# Altium PCB CD Spot Welder Control Circuit PCB_2023-06-06.pcbdoc
Units mil, origin at the board's own origin, x right, y up, seen from the top; angles counter-clockwise.
Board outline 10544 x 5595 mil, 2 copper layers (Top Layer, Bottom Layer); 45 components, 56 nets, 186 pads, 121 vias.
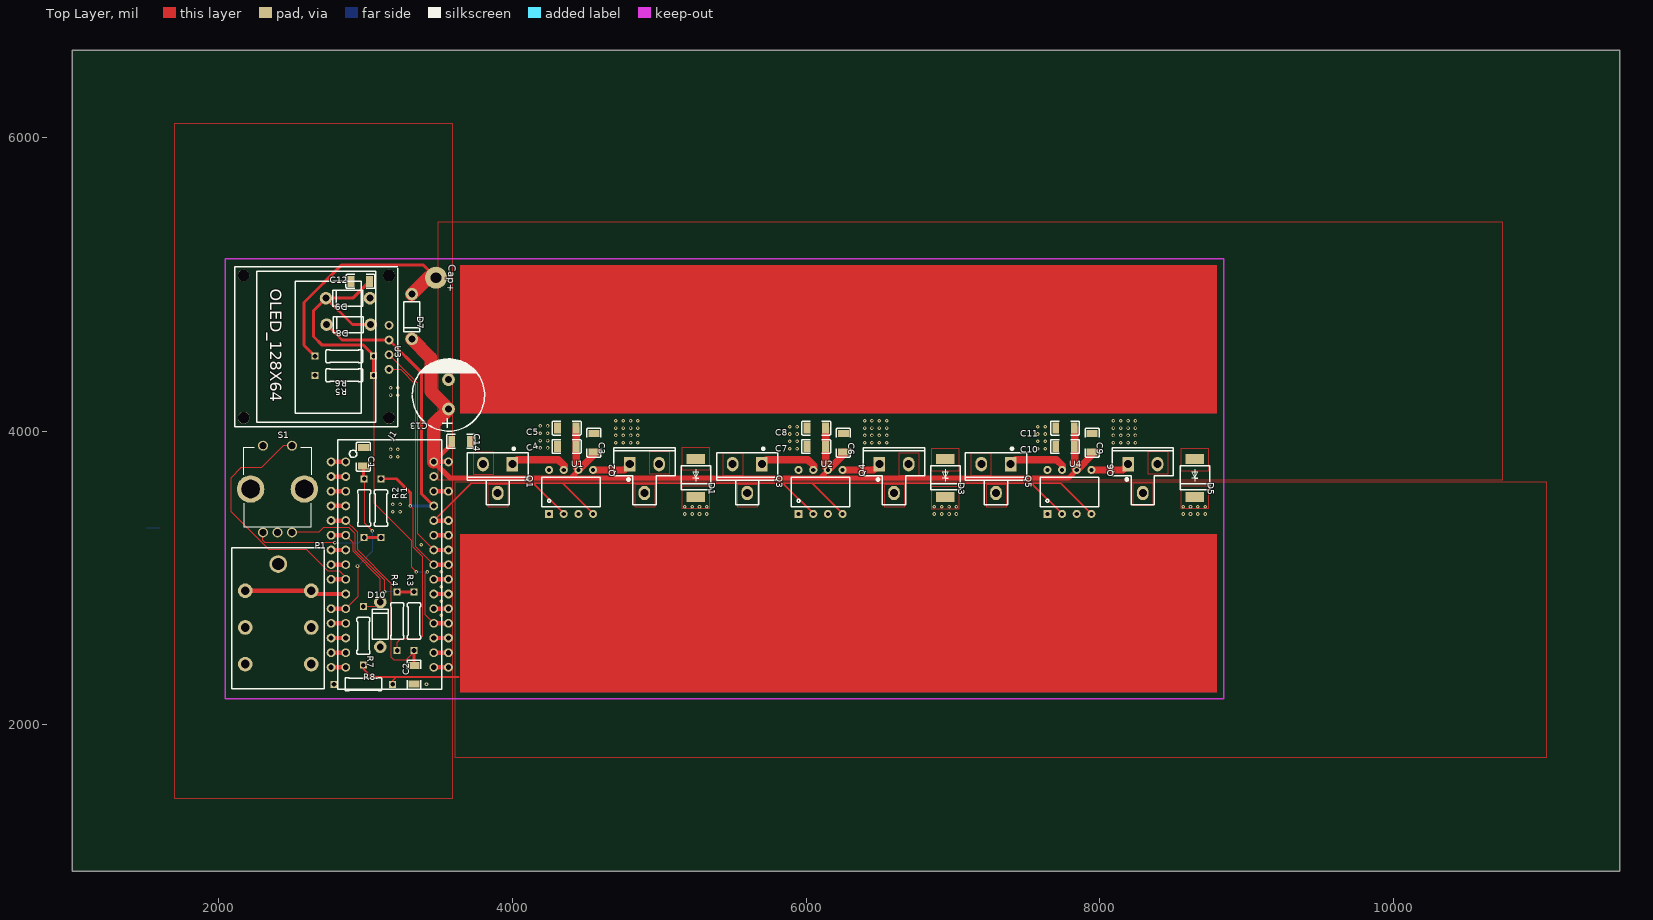
[diagram p0: Top Layer view]
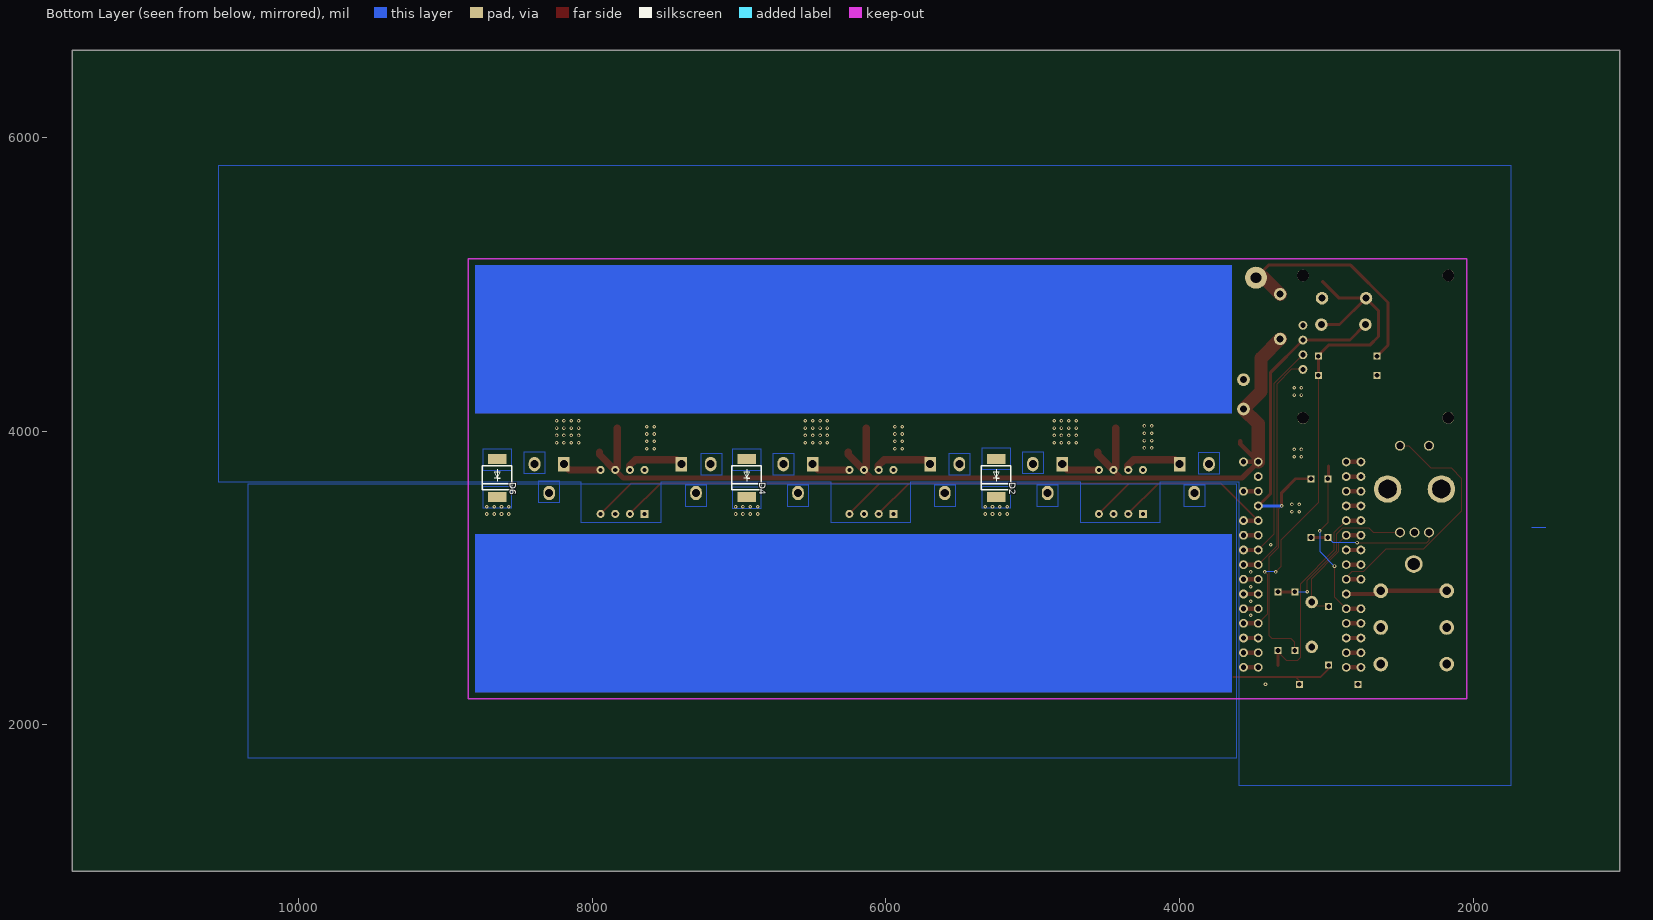
[diagram p1: Bottom Layer view, seen from below]

## Layer stack, top to bottom
Top Layer: signal copper (thickness not stored)
Dielectric: dielectric 12.6, FR-4, Dk 4.8
Bottom Layer: signal copper (thickness not stored)

## Board outline
11544,1000 1000,1000 1000,6595 11544,6595

## Components (designator, comment, footprint, x,y, rotation, side; value= is the part's Value field where it differs from the comment)
C1 "10nF" C1206 2984,3825 r270 top
C2 "10nF" C1206 3329,2340 r90 top
C3 "100nF" C1206 4554,3920 r270 top
C4 "2.2uF" C1206 4369,3895 r0 top
C5 "2.2uF" C1206 4369,4020 r0 top
C6 "100nF" C1206 6254,3920 r270 top
C7 "2.2uF" C1206 6069,3895 r0 top
C8 "2.2uF" C1206 6069,4020 r0 top
C9 "100nF" C1206 7949,3920 r270 top
C10 "2.2uF" C1206 7764,3895 r0 top
C11 "2.2uF" C1206 7764,4020 r0 top
C12 "10nF" C1206 2964,5020 r0 top
C13 "470uF" CAP-D12.5XF5.0 3564,4250 r180 top
C14 "2.2uF" C1206 3649,3930 r0 top
D1 "TVS Diode" SMC(DO-214AB)#1 5248.97,3680 r270 top
D2 "TVS Diode" SMC(DO-214AB)#2 5248.97,3680 r90 bottom
D3 "TVS Diode" SMC(DO-214AB)#1 6948.97,3680 r270 top
D4 "TVS Diode" SMC(DO-214AB)#2 6948.97,3680 r90 bottom
D5 "TVS Diode" SMC(DO-214AB)#1 8648.97,3680 r270 top
D6 "TVS Diode" SMC(DO-214AB)#2 8648.97,3680 r90 bottom
D7 "1N4007" DO-41#1 3314,4780 r270 top
D8 "1N5819" DO-41#2 3034,4725 r180 top
D9 "1N5819" DO-41#2 3029,4905 r180 top
D10 "1N4732A" DO-41#3 3099,2530 r90 top
J1 "Arduino_Nano_Header" DIP-30_L43.18-W15.24-ARDUINONANO 3164,3090 r0 top
P1 "Amphenol ACJS-MHDR" "AMPHENOL ACJS-MHDR" 2404,2245 r180 top
Q1 "IRFB7430PBF_R_OFFSET_FOOTPRINT" TO-220-3_MIDDLE_OFFSET_R 3899,3775 r270 top
Q2 "IRFB7430PBF_L_OFFSET_FOOTPRINT" TO-220-3_MIDDLE_OFFSET_L 4899,3775 r90 top
Q3 "IRFB7430PBF_R_OFFSET_FOOTPRINT" TO-220-3_MIDDLE_OFFSET_R 5599,3775 r270 top
Q4 "IRFB7430PBF_L_OFFSET_FOOTPRINT" TO-220-3_MIDDLE_OFFSET_L 6599,3775 r90 top
Q5 "IRFB7430PBF_R_OFFSET_FOOTPRINT" TO-220-3_MIDDLE_OFFSET_R 7294,3775 r270 top
Q6 "IRFB7430PBF_L_OFFSET_FOOTPRINT" TO-220-3_MIDDLE_OFFSET_L 8294,3775 r90 top
R1 "10k" RTH025W 3104,3475 r90 top
R2 "10k" RTH025W 2989,3475 r90 top
R3 "10k" RTH025W 3329,2705 r270 top
R4 "10k" RTH025W 3214,2705 r90 top
R5 "3.3k" RTH025W 2854,4380 r0 top
R6 "10k" RTH025W 2854,4510 r180 top
R7 "620" RTH025W 2984,2605 r270 top
R8 "1k" RTH025W 2984,2275 r0 top
S1 "EN11-HSM" EN11HSM1BF20 2399,3605 r0 top
U1 "MCP1404-EP_FULL_SCHEMATIC" DIP8 4399,3585 r0 top
U2 "MCP1404-EP_FULL_SCHEMATIC" DIP8 6099,3585 r0 top
U3 "OLED_128X64" OLED_128X64 2719,4620 r270 top
U4 "MCP1404-EP_FULL_SCHEMATIC" DIP8 7794,3585 r0 top

## Footprints (in the part's own frame and the unit in brackets; to place one, negate y for a bottom-side part, rotate by r counter-clockwise, add the part's x,y. Pads: shape width x height; smd on the part's side, far side on the other; paste and mask are expansions set on the pad)
"AMPHENOL ACJS-MHDR" [mil]
  round 120 hole 83: 7(0,-849)
  round 100 hole 60: R(-224.5,-417) RN(224.5,-417) S(-224.5,-167) SN(224.5,-167) T(-224.5,-667) TN(224.5,-667)
  silkscreen extent -315,-960 315,0
C1206 [mm]
  rect 1.2x1.9 smd: 1(-1.6,0) 2(1.6,0)
  silkscreen extent -2.5,-1.2 2.5,1.2
CAP-D12.5XF5.0 [mm]
  round 2.2 hole 1.2: 1(0,2.54) 2(0,-2.54)
  silkscreen extent -6.25,-6.17 6.25,6.37
DIP8 [mil]
  rect 55x55 hole 28: 1(-150,-150)
  round 55 hole 28: 2(-50,-150) 3(50,-150) 4(150,-150) 5(150,150) 6(50,150) 7(-50,150) 8(-150,150)
  silkscreen extent -200,-100 200,100
DIP-30_L43.18-W15.24-ARDUINONANO [mil]
  round 60 hole 36: 1(-300,700) 2(-300,600) 3(-300,500) 4(-300,400) 5(-300,300) 6(-300,200) 7(-300,100) 8(-300,0) 9(-300,-100) 10(-300,-200) 11(-300,-300) 12(-300,-400) 13(-300,-500) 14(-300,-600) 15(-300,-700) 16(300,-700) 17(300,-600) 18(300,-500) 19(300,-400) 20(300,-300) 21(300,-200) 22(300,-100) 23(300,0) 24(300,100) 25(300,200) 26(300,300) 27(300,400) 28(300,500) 29(300,600) 30(300,700)
  silkscreen extent -354,-850 354,850
DO-41#1 [mil]
  round 85 hole 47.24: 1(-152.5,0) 2(152.5,0)
  silkscreen extent -103,-54 103,54
DO-41#2 [mil]
  round 85 hole 47.24: 1(0,0) 2(300,0)
  silkscreen extent 50,-54 255,54
DO-41#3 [mil]
  round 85 hole 47.24: 1(0,0) 2(305,0)
  silkscreen extent 50,-54 255,54
EN11HSM1BF20 [mm]
  round 1.725 hole 1.15 slot 1.155 at 0 deg: 1(-2.5,-7.5) 2(0,-7.5) 3(2.5,-7.5) 4(-2.5,7.5) 5(2.5,7.5)
  round 4.743 hole 3.162 slot 3.167 at 0 deg: 6(-4.65,0) 7(4.65,0)
  silkscreen extent -5.85,-6.5 5.85,7.25
OLED_128X64 [mil]
  round 60 hole 36: 1(-100,440) 2(0,440) 3(100,440) 4(200,440)
  round 80 hole 80 unplated: ""(-440,440) ""(-440,-550) ""(530,440) ""(530,-550)
  silkscreen extent -500,-610 590,500
RTH025W [mil]
  rect 47.7x47.7 hole 32: 1(-200,0) 2(200,0)
  silkscreen extent -125,-45 125,45
SMC(DO-214AB)#1 [mil]
  rect 67.87x126 smd: 1(-128.41,0) 2(128.41,0)
  silkscreen extent -82,-100 81,100
SMC(DO-214AB)#2 [mil]
  rect 67.87x126 smd: 1(128.41,0) 2(-128.41,0)
  silkscreen extent -81,-100 82,100
TO-220-3_MIDDLE_OFFSET_L [mm]
  rect 2.5x2 hole 1.4: 1(0,2.54)
  oval 2.5x2 hole 1.4: 2(-5,0) 3(0,-2.54)
  silkscreen extent -7,-5.3 2.8,5.3
TO-220-3_MIDDLE_OFFSET_R [mm]
  rect 2.5x2 hole 1.4: 1(0,2.54)
  oval 2.5x2 hole 1.4: 2(5,0) 3(0,-2.54)
  silkscreen extent -2.86,-5.3 7,5.3

## Free pads (board coordinates)
  round 150 hole 72: 1(3479,5045)
  round 60 hole 36: 2(2764,2390) 2(2764,2490) 2(2764,2590) 2(2764,2690) 2(2764,2790) 2(2764,2990) 2(2764,3090) 2(2764,3190) 2(2764,3290) 2(2764,3390) 2(2764,3490) 2(2764,3590) 2(2764,3690) 2(2764,3790) 2(3564,2390) 2(3564,2490) 2(3564,2590) 2(3564,2690) 2(3564,2790) 2(3564,2890) 2(3564,2990) 2(3564,3090) 2(3564,3190) 2(3564,3290) 2(3564,3390) 2(3564,3590) 2(3564,3790)

## Via types
v1: diameter 24, hole 12, Top Layer to Bottom Layer, tented both sides, 121 vias

## Nets (pads, with @x,y where several pads share a name; then routed paths per layer and width w, separated by ;. In a path a pad name is that pad's centre, name@x,y a point inside that pad or via, vN(x,y) a via of type N, cw(c..) or ccw(c..) an arc to the next point about the centre after c; other vN are vias at no path point)
+5V: D8.2 J1.27 R1.2 R4.1 U3.2 | length 3383
  Top Layer w8: R4.1 3214,2560 3239,2585 3369,2585 3389,2605 3389,3145 3324,3210 3324,3470 v1(3304,3490)
  Top Layer w20: D8.2 2839,4620 U3.2 3379,4400 3379,3575 J1.27 ; R1.2 3209,3675 3304,3580 v1(3304,3490)
  Bottom Layer w20: v1(3304,3490) J1.27
GND: C1.1 C2.1 C3.1 C4.1 C5.1 C6.1 C7.1 C8.1 C9.1 C10.1 C11.1 C12.1 C13.2 C14.2 D1.1 D2.1 D3.1 D4.1 D5.1 D6.1 D9.1 D10.1 J1.4 J1.29 P1.S P1.SN pad.2@2764,3490 Q1.3 Q2.3 Q3.3 Q4.3 Q5.3 Q6.3 R5.1 R8.1 S1.2 S1.4 U1.3 U2.3 U3.1 U4.3 | length 100
  Top Layer w30: pad.2@2764,3490 J1.4
  other v1: 3414,2275 3514,2745 3514,2840 3514,2940 3514,3040 3379,3225 3184,3450 3234,3450 3184,3500 3234,3500 3169,3825 3219,3825 3169,3875 3219,3875 5889,3880 5939,3880 7579,3880 7629,3880 4189,3885 4239,3885 4704,3920 4754,3920 4804,3920 4854,3920 6399,3920 6449,3920 6499,3920 6549,3920 8094,3920 8144,3920 8194,3920 8244,3920 5889,3930 5939,3930 7579,3930 7629,3930 4189,3935 4239,3935 4704,3970 4754,3970 4804,3970 4854,3970 6399,3970 6449,3970 6499,3970 6549,3970 8094,3970 8144,3970 8194,3970 8244,3970 5889,3980 5939,3980 7579,3980 7629,3980 4189,3985 4239,3985 4704,4020 4754,4020 4804,4020 4854,4020 6399,4020 6449,4020 6499,4020 6549,4020 8094,4020 8144,4020 8194,4020 8244,4020 5889,4030 5939,4030 7579,4030 7629,4030 4189,4035 4239,4035 4704,4070 4754,4070 4804,4070 4854,4070 6399,4070 6449,4070 6499,4070 6549,4070 8094,4070 8144,4070 8194,4070 8244,4070 3169,4245 3219,4245 3169,4295 3219,4295
J1_1: J1.1 pad.2@2764,3790 | length 100
  Top Layer w30: pad.2@2764,3790 J1.1
J1_2: J1.2 pad.2@2764,3690 | length 100
  Top Layer w30: pad.2@2764,3690 J1.2
J1_3: J1.3 pad.2@2764,3590 | length 100
  Top Layer w30: pad.2@2764,3590 J1.3
J1_5: C2.2 J1.5 pad.2@2764,3390 R3.2 | length 1446.5
  Top Layer w8: J1.5 2944,3310 2944,3190 3174,2960 3174,2460 3194,2440 3274,2440 R3.2@3329,2495
  Top Layer w20: C2.2 R3.2
  Top Layer w30: pad.2@2764,3390 J1.5
J1_6: D10.2 J1.6 pad.2@2764,3290 R7.1 | length 779.8
  Top Layer w8: J1.6 2914,3240 2914,3180 3099,2995 D10.2 3069,2805 R7.1
  Top Layer w30: pad.2@2764,3290 J1.6
J1_7: J1.7 pad.2@2764,3190 | length 100
  Top Layer w30: pad.2@2764,3190 J1.7
J1_8: J1.8 pad.2@2764,3090 | length 100
  Top Layer w30: pad.2@2764,3090 J1.8
J1_9: J1.9 pad.2@2764,2990 S1.5 | length 1821
  Top Layer w8: S1.5 2439.3,3900.3 2289,3750 2149,3750 2079,3680 2079,3455 2339.1,3195 2594,3195 2709,3080 2744,3045 2824,3045 2864,3005 J1.9
  Top Layer w30: pad.2@2764,2990 J1.9
J1_10: J1.10 P1.T P1.TN | length 693.6
  Top Layer w30: P1.TN P1.T 2650.5,2890 J1.10
J1_11: C1.2 J1.11 pad.2@2764,2790 R2.2 | length 1171.4
  Top Layer w8: J1.11 2944,2870 v1(2944,3080) ; R2.2 2989,3375 v1(3044,3320)
  Top Layer w20: C1.2 2984,3680 R2.2
  Top Layer w30: pad.2@2764,2790 J1.11
  Bottom Layer w8: v1(2944,3080) 3044,3180 v1(3044,3320)
J1_12: J1.12 pad.2@2764,2690 | length 100
  Top Layer w30: pad.2@2764,2690 J1.12
J1_13: J1.13 pad.2@2764,2590 | length 100
  Top Layer w30: pad.2@2764,2590 J1.13
J1_14: J1.14 pad.2@2764,2490 | length 100
  Top Layer w30: pad.2@2764,2490 J1.14
J1_15: J1.15 pad.2@2764,2390 | length 100
  Top Layer w30: pad.2@2764,2390 J1.15
J1_16: J1.16 pad.2@3564,2390 | length 100
  Top Layer w30: J1.16 pad.2@3564,2390
J1_17: J1.17 pad.2@3564,2490 | length 100
  Top Layer w30: J1.17 pad.2@3564,2490
J1_18: J1.18 pad.2@3564,2590 | length 100
  Top Layer w30: J1.18 pad.2@3564,2590
J1_19: C12.2 D8.1 D9.2 J1.19 pad.2@3564,2690 R5.2 R6.1 | length 3645.3
  Top Layer w8: R5.2 3054,3720 3054,3510 3309,3255 3309,3075 v1(3344,3040) ; v1(3419,3040) 3403.07,3024.07 3403.07,2750.93 J1.19
  Top Layer w20: D9.2@2739,4905 2912,4905 C12.2 ; D8.1@3044,4725 2909,4725 D9.2 2644,4820 2644,4645 2704,4585 2984,4585 R6.1@3059,4510 ; R5.2 3054,4505 R6.1@3059,4510 ; R6.1@3064,4510 R6.1@3059,4510
  Top Layer w30: J1.19 pad.2@3564,2690
  Bottom Layer w8: v1(3344,3040) v1(3419,3040)
J1_20: J1.20 pad.2@3564,2790 | length 100
  Top Layer w30: J1.20 pad.2@3564,2790
J1_21: J1.21 pad.2@3564,2890 | length 100
  Top Layer w30: J1.21 pad.2@3564,2890
J1_22: J1.22 pad.2@3564,2990 | length 100
  Top Layer w30: J1.22 pad.2@3564,2990
J1_23: J1.23 pad.2@3564,3090 U3.4 | length 1603.2
  Top Layer w8: U3.4 3239,4420 3339,4320 3339,3215 J1.23
  Top Layer w30: J1.23 pad.2@3564,3090
J1_24: J1.24 pad.2@3564,3190 U3.3 | length 1556.3
  Top Layer w8: U3.3 3354,4325 3354,3300 J1.24
  Top Layer w30: J1.24 pad.2@3564,3190
J1_25: J1.25 pad.2@3564,3290 | length 100
  Top Layer w30: J1.25 pad.2@3564,3290
J1_28: J1.28 pad.2@3564,3590 | length 100
  Top Layer w30: J1.28 pad.2@3564,3590
P1_R: P1.R
P1_RN: P1.RN
R1_1: R1.1 R2.1 S1.1 | length 881.1
  Top Layer w8: S1.1 2299,3308.14 2299,3255 2314,3240 v1(2790.06,3240)
  Top Layer w20: R2.1 R1.1
  Bottom Layer w8: v1(2790.06,3240) 2954,3240 R2.1
R3_1: R3.1 R4.2 S1.3 | length 1138.6
  Top Layer w8: S1.3 2678.7,3309.7 2709,3340 2889,3340 2929,3300 2929,3185 3129,2985 v1(3129,2905)
  Top Layer w20: R4.2 R3.1
  Bottom Layer w8: v1(3129,2905) R4.2
S1_6: S1.6
S1_7: S1.7
S$13: 
S$16: 
S$18: 
S$52: 
S$55: 
S$1278: 
S$8375:  | length 95
  Bottom Layer w8: 1504,3340 1599,3340
U1_1: U1.1
U1_4: J1.26 pad.2@3564,3390 U1.2 U1.4 U2.2 U2.4 U4.2 U4.4 | length 18628.5
  Top Layer w10: J1.26 3619,3545 3719,3645 ; 3762.43,3645 3719,3645 ; U1.2@4351.5,3435 4141.5,3645 3719,3645 ; U1.4@4551.5,3435 4341.5,3645 3719,3645 ; 5641.5,3645 3719,3645 ; 6041.5,3645 U2.4@6251.5,3435 ; U2.2@6051.5,3435 5841.5,3645 3719,3645 ; 7141.5,3645 3719,3645 ; U4.2 7534,3645 3719,3645 ; U4.4 7734,3645 3719,3645
  Top Layer w30: J1.26 pad.2@3564,3390
U1_5: Q2.1 U1.5 | length 266.6
  Top Layer w50: U1.5@4551.5,3735 4761.5,3735 Q2.1@4801.5,3775
U1_7: Q1.1 U1.7 | length 409
  Top Layer w50: Q1.1@4001.5,3775 4031.5,3805 4311.5,3805 4351.5,3765 U1.7@4351.5,3735
U1_8: U1.8
U2_1: U2.1
U2_5: Q4.1 U2.5 | length 266.6
  Top Layer w50: U2.5@6251.5,3735 6461.5,3735 Q4.1@6501.5,3775
U2_7: Q3.1 U2.7 | length 409
  Top Layer w50: Q3.1@5701.5,3775 5731.5,3805 6011.5,3805 6051.5,3765 U2.7@6051.5,3735
U2_8: U2.8
U4_1: U4.1
U4_5: Q6.1 U4.5 | length 266.6
  Top Layer w50: U4.5@7946.5,3735 8156.5,3735 Q6.1@8196.5,3775
U4_7: Q5.1 U4.7 | length 409
  Top Layer w50: Q5.1@7396.5,3775 7426.5,3805 7706.5,3805 7746.5,3765 U4.7@7746.5,3735
U4_8: U4.8
VCAP: D7.1 pad.1 R6.2 | length 1648.5
  Top Layer w20: R6.2 2579,4585 2579,4875 2834,5130 3394,5130 pad.1
  Top Layer w90: D7.1 3426.5,5045 pad.1
VCC: C3.2 C4.2 C5.2 C6.2 C7.2 C8.2 C9.2 C10.2 C11.2 C13.1 C14.1 D7.2 J1.30 pad.2@3564,3790 U1.6 U2.6 U4.6 | length 7307.4
  Top Layer w30: pad.2@3564,3790 J1.30 3586.01,3912.01 C14.1
  Top Layer w35: J1.30 3574,3680 7789,3680 U4.6 ; 4359.93,3680 4396.5,3680 U1.6@4451.5,3735 ; 6075.17,3680 6096.5,3680 U2.6@6151.5,3735
  Top Layer w50: C5.2@4434.49,4020 4434.49,3895 4434.49,3752 4451.5,3735 4556.5,3840 C3.2@4556.5,3857 ; C8.2@6134.49,4020 6134.49,3895 6134.49,3752 6151.5,3735 6256.5,3840 C6.2@6256.5,3857 ; C11.2@7829.49,4020 7829.49,3895 7829.49,3752 7846.5,3735 7951.5,3840 C9.2@7951.5,3857
  Top Layer w90: D7.2 3444,4497.5 3444,4270 C13.1 3464,4050 J1.30
VEE: D1.2 D2.2 D3.2 D4.2 D5.2 D6.2 Q1.2 Q2.2 Q3.2 Q4.2 Q5.2 Q6.2 R7.2 R8.2 | length 757.8
  Top Layer w12: R7.2 2984,2380 3039,2325 3634,2325 ; R8.2 3184,2300.8 3208.2,2325
  other v1: 5174,3435 5224,3435 5274,3435 5324,3435 6874,3435 6924,3435 6974,3435 7024,3435 8569,3435 8619,3435 8669,3435 8719,3435 5174,3485 5224,3485 5274,3485 5324,3485 6874,3485 6924,3485 6974,3485 7024,3485 8569,3485 8619,3485 8669,3485 8719,3485
pads on no net: P1.7 U3.

## Polygon pours and split planes (outlines as drawn)
VEE on Bottom Layer (solid): 3614,3640 3614,1770 10344,1770 10344,3640
GND on Bottom Layer (solid): 1744,5810 1744,1585 3594,1585 3594,3650 4134,3650 4134,3375 4674,3375 4674,3650 5834,3650 5834,3375 6374,3375 6374,3650 7534,3650 7534,3375 8074,3375 8074,3650 10544,3650 10544,5810
VEE on Bottom Layer (solid): 8224,3660 8224,3510 8364,3510 8364,3660
VEE on Bottom Layer (solid): 7224,3635 7224,3485 7364,3485 7364,3635
VEE on Bottom Layer (solid): 6529,3635 6529,3485 6669,3485 6669,3635
VEE on Bottom Layer (solid): 5529,3635 5529,3485 5669,3485 5669,3635
VEE on Bottom Layer (solid): 4829,3635 4829,3485 4969,3485 4969,3635
VEE on Bottom Layer (solid): 3829,3635 3829,3485 3969,3485 3969,3635
GND on Bottom Layer (solid): 3729,3855 3729,3705 3869,3705 3869,3855
GND on Bottom Layer (solid): 4929,3860 4929,3710 5069,3710 5069,3860
GND on Bottom Layer (solid): 5429,3850 5429,3700 5569,3700 5569,3850
GND on Bottom Layer (solid): 6629,3850 6629,3700 6769,3700 6769,3850
GND on Bottom Layer (solid): 7119,3850 7119,3700 7259,3700 7259,3850
GND on Bottom Layer (solid): 8324,3860 8324,3710 8464,3710 8464,3860
VEE on Bottom Layer (solid): 5154,3625 5154,3475 5344,3475 5344,3625
VEE on Bottom Layer (solid): 6854,3620 6854,3470 7044,3470 7044,3620
VEE on Bottom Layer (solid): 8554,3625 8554,3475 8744,3475 8744,3625
GND on Bottom Layer (solid): 8554,3880 8554,3730 8744,3730 8744,3880
GND on Bottom Layer (solid): 6854,3880 6854,3730 7044,3730 7044,3880
GND on Bottom Layer (solid): 5154,3885 5154,3735 5344,3735 5344,3885
VEE on Top Layer (solid): 8226.5,3645 8226.5,3495 8366.5,3495 8366.5,3645
VEE on Top Layer (solid): 7226.5,3635 7226.5,3485 7366.5,3485 7366.5,3635
VEE on Top Layer (solid): 6531.5,3635 6531.5,3485 6671.5,3485 6671.5,3635
VEE on Top Layer (solid): 5531.5,3635 5531.5,3485 5671.5,3485 5671.5,3635
VEE on Top Layer (solid): 4831.5,3635 4831.5,3485 4971.5,3485 4971.5,3635
VEE on Top Layer (solid): 3831.5,3635 3831.5,3485 3971.5,3485 3971.5,3635
GND on Top Layer (solid): 3731.5,3855 3731.5,3705 3871.5,3705 3871.5,3855
GND on Top Layer (solid): 4931.5,3860 4931.5,3710 5071.5,3710 5071.5,3860
GND on Top Layer (solid): 5431.5,3850 5431.5,3700 5571.5,3700 5571.5,3850
GND on Top Layer (solid): 8326.5,3860 8326.5,3710 8466.5,3710 8466.5,3860
GND on Top Layer (solid): 7121.5,3850 7121.5,3700 7261.5,3700 7261.5,3850
GND on Top Layer (solid): 6631.5,3850 6631.5,3700 6771.5,3700 6771.5,3850
GND on Top Layer (solid): 3594,1500 3594,6095 1694,6095 1694,1500
VEE on Top Layer (solid): 3609,3655 11044,3655 11044,1775 3609,1775
GND on Top Layer (solid): 3494,3665 3494,5425 10744,5425 10744,3665
VEE on Top Layer (solid): 8554,3625 8554,3475 8744,3475 8744,3625
VEE on Top Layer (solid): 6854,3620 6854,3470 7044,3470 7044,3620
VEE on Top Layer (solid): 5154,3625 5154,3475 5344,3475 5344,3625
GND on Top Layer (solid): 5154,3885 5154,3735 5344,3735 5344,3885
GND on Top Layer (solid): 6854,3880 6854,3730 7044,3730 7044,3880
GND on Top Layer (solid): 8554,3880 8554,3730 8744,3730 8744,3880

## Other copper
Top Layer:
  rectangle net VEE: 3644,2220 8799,3300
  rectangle net GND: 3644,4120 8799,5130
Bottom Layer:
  rectangle net GND: 3644,4120 8799,5130
  rectangle net VEE: 3644,2220 8799,3300

## Silkscreen, mask and mechanical layers (free items; w line width, h text height)
Top Overlay:
  text "Cap+" at 3564.03,5136.31 h50 r267
Top Solder:
  rectangle net VEE: 3642,2218 8801,3302
  rectangle net GND: 3642,4118 8801,5132
Bottom Solder:
  rectangle net VEE: 3642,2218 8801,3302
  rectangle net GND: 3642,4118 8801,5132